# Altium PCB My_CryStal.PcbDoc
Units mm, origin at the board's own origin, x right, y up, seen from the top; angles counter-clockwise.
Board outline 118.11 x 115.19 mm, 2 copper layers (Top Layer, Bottom Layer); 87 components, 64 nets, 286 pads, 67 vias.
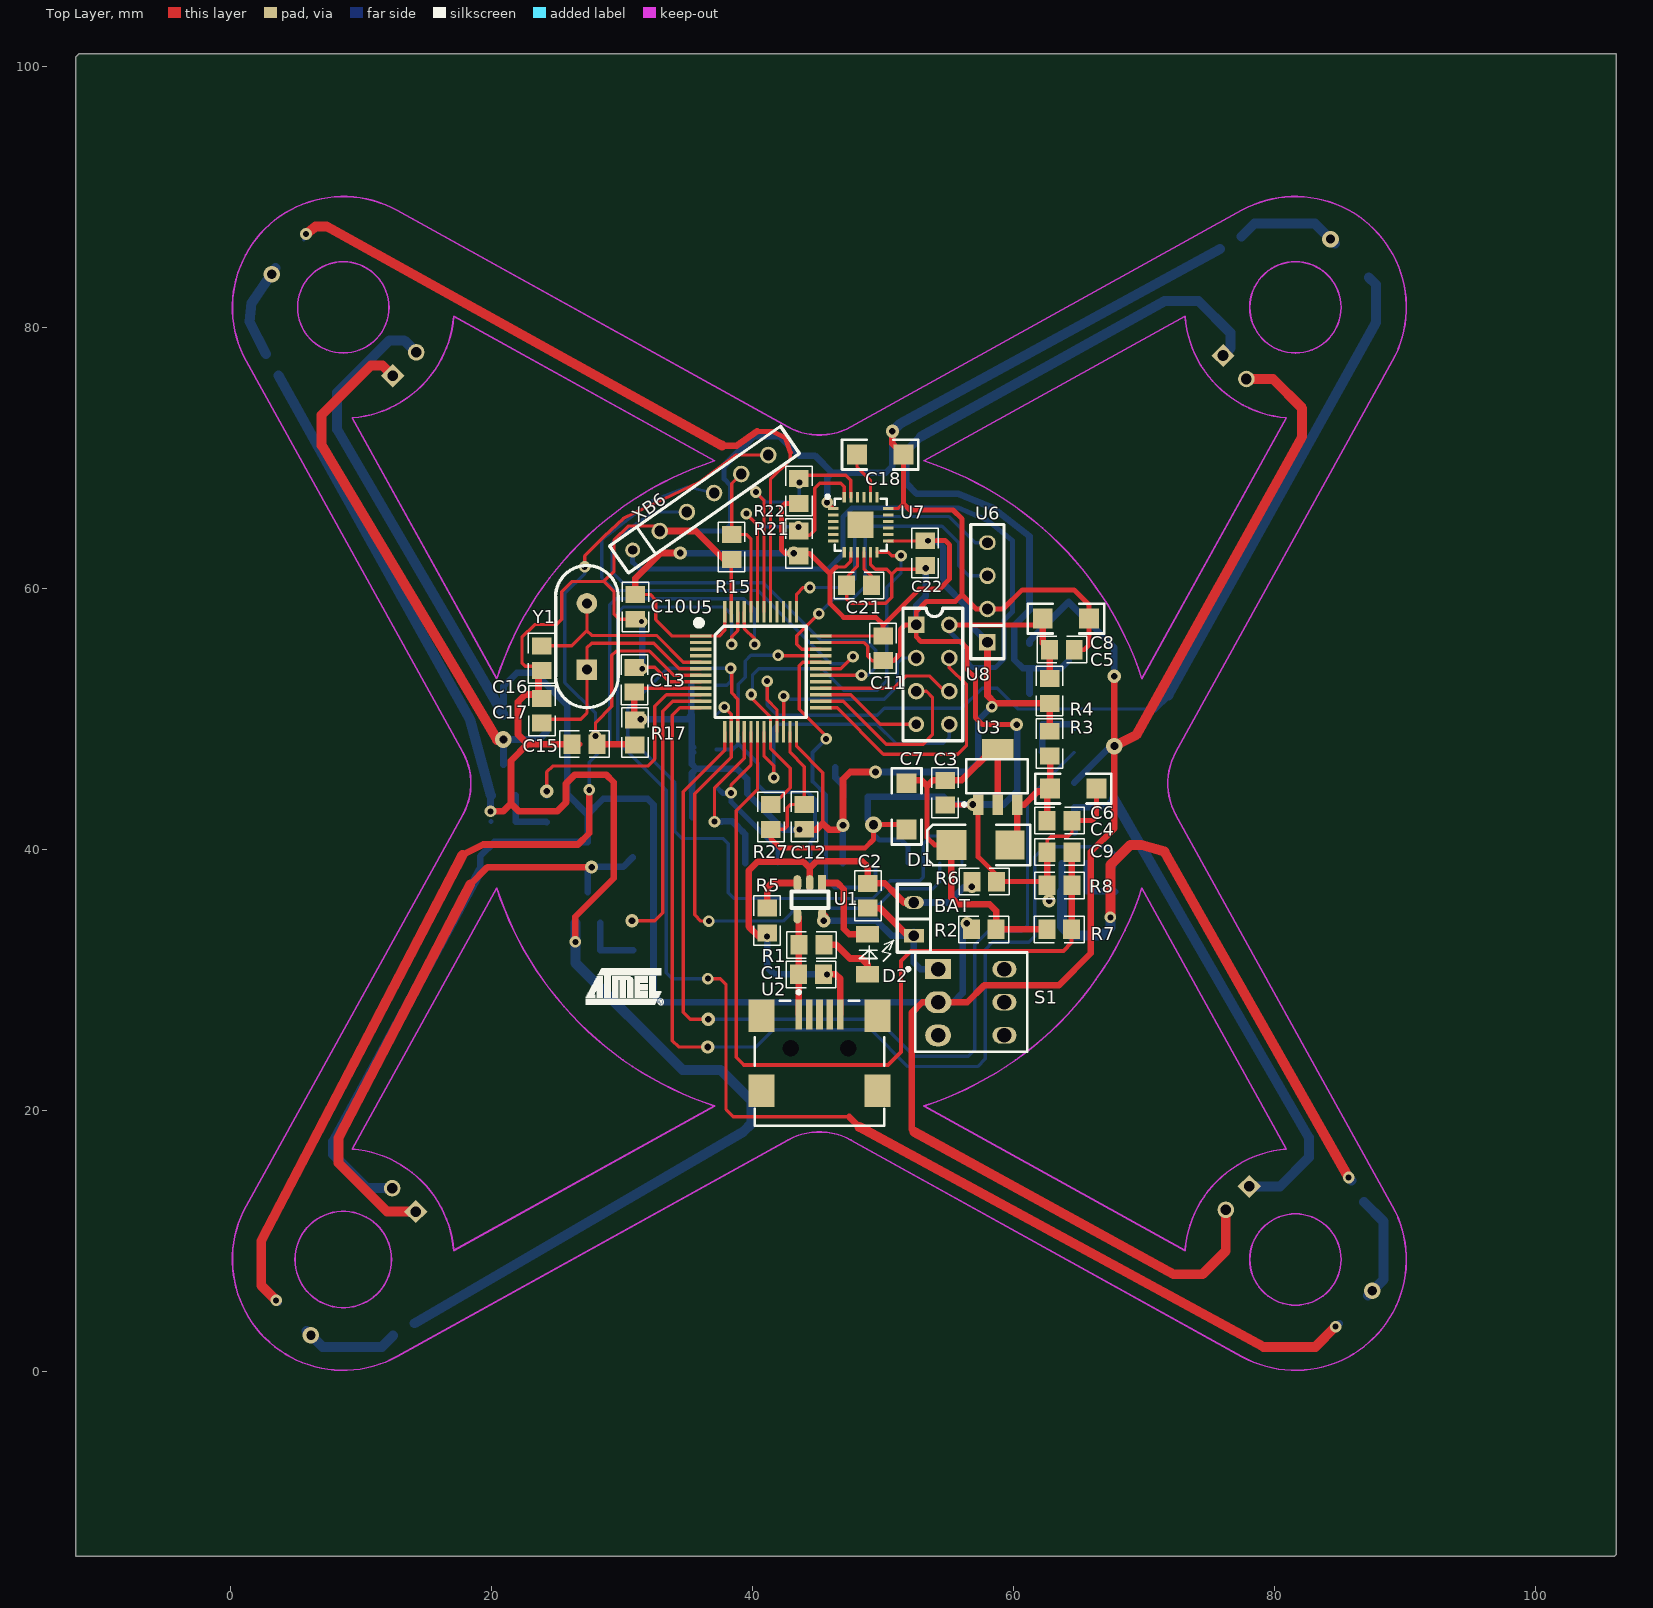
[diagram p0: Top Layer view]
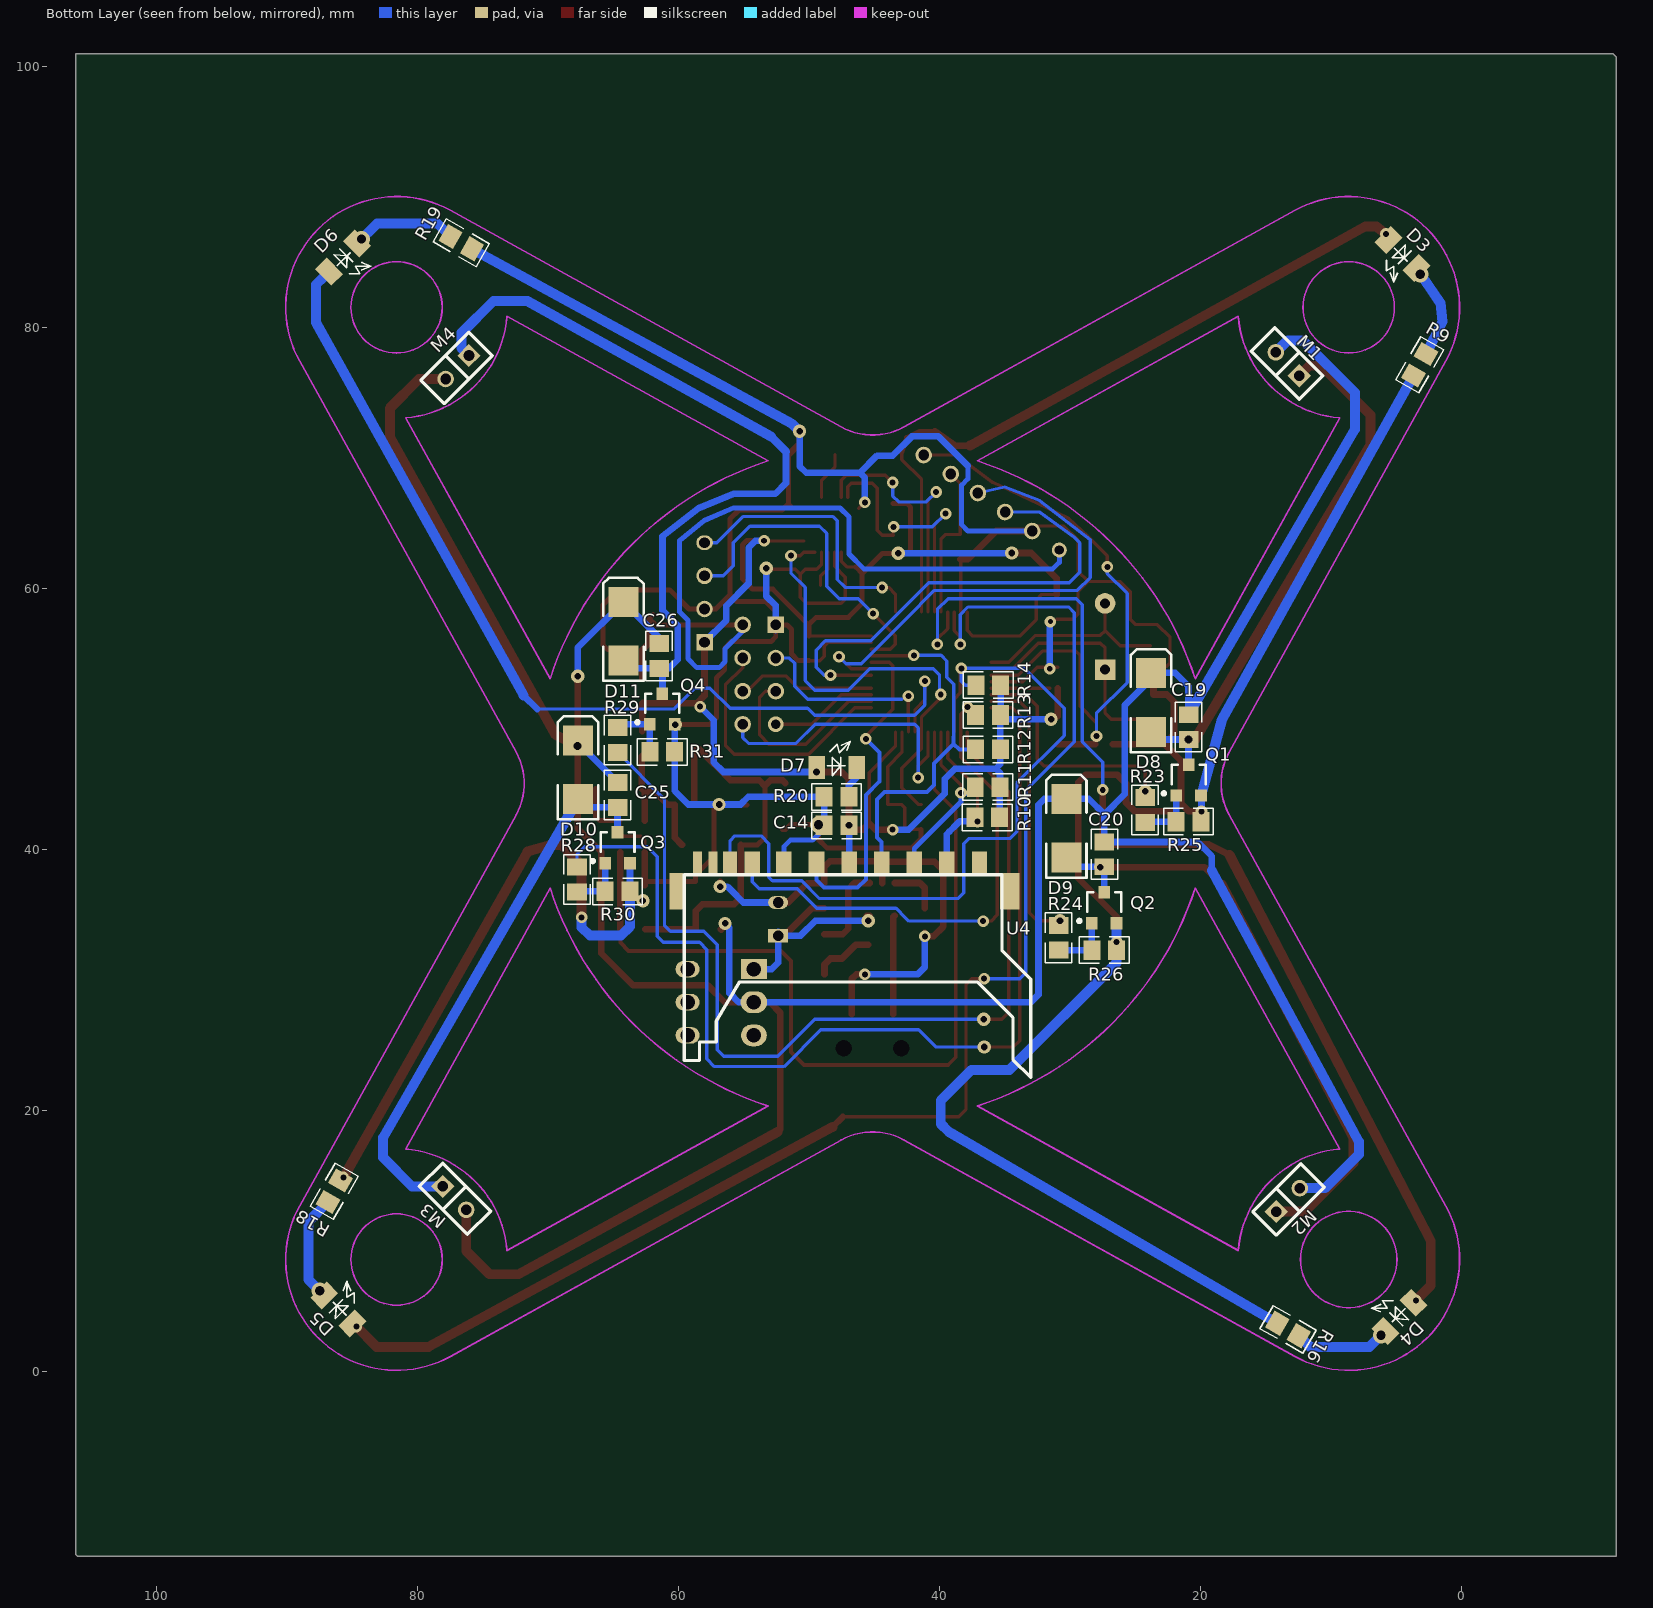
[diagram p1: Bottom Layer view, seen from below]

## Layer stack, top to bottom
Top Layer: signal copper 0.0356
Dielectric: dielectric 0.32, FR-4, Dk 4.8
Bottom Layer: signal copper 0.0356

## Board outline
-11.633,101.016 106.223,101.016 106.223,-14.046 106.096,-14.173 -11.887,-14.173 -11.887,100.762 -11.633,101.016

## Design rules (kind name [scope] priority, off if disabled: settings)
Clearance [All] p1: gap=0.24
PolygonConnect [All] p1: connectstyle=Relief reliefconductorwidth=0.254 reliefentries=4 polygonreliefangle="90 Angle"
RoutingVias [All] p1: holewidth=0.508 width=1.016 viastyle="Through Hole" minholewidth=0.381 minwidth=0.762 maxholewidth=0.711 maxwidth=1.27
SilkscreenOverComponentPads [All] p1: minsilkscreentomaskgap=0.254
SolderMaskExpansion [All] p1: expansion=0.102
Width [All] p1: maxlimit=2.54 minlimit=0.203 preferedwidth=0.254 minimp=50.000000 maximp=50.000000 favimp=50.000000
27 further rules are at their usual default settings.

## Components (designator, comment, footprint, x,y, rotation, side; value= is the part's Value field where it differs from the comment)
BAT "CON1" SIP2#1 52.375,33.401 r90 top (schematic designator CON1)
C1 "1uF" "0805 - duplicate" 45.441,30.429 r180 top
C2 "1uF" "0805 - duplicate" 48.844,37.414 r270 top
C3 "104" "0805 - duplicate" 54.762,43.409 r90 top
C4 "104" "0805 - duplicate" 64.491,42.215 r180 top
C5 "104" "0805 - duplicate" 64.668,55.321 r180 top
C6 "10uF/25V" 1206 62.814,44.679 r0 top
C7 "47uF/25V" 1206 51.816,45.085 r270 top
C8 "10uF/25V" 1206 62.255,57.709 r0 top
C9 "1uF" "0805 - duplicate" 62.586,39.802 r0 top
C10 "104" "0805 - duplicate" 31.013,57.658 r90 top
C11 "104" "0805 - duplicate" 50.013,54.483 r90 top
C12 "104" "0805 - duplicate" 43.967,43.459 r270 top
C13 "104" "0805 - duplicate" 30.937,53.975 r270 top
C14 "1uF" "0805 - duplicate" 46.939,41.859 r0 bottom
C15 "104" "0805 - duplicate" 26.162,48.082 r0 top
C16 "Cap" "0805 - duplicate" 23.825,53.721 r90 top
C17 "Cap" "0805 - duplicate" 23.851,51.587 r270 top
C18 "2.2uF/25V" 1206 48.006,70.282 r0 top
C19 "104" "0805 - duplicate" 20.904,48.438 r90 bottom
C20 "104" "0805 - duplicate" 27.356,38.684 r90 bottom
C21 "103" "0805 - duplicate" 49.124,60.249 r180 top
C22 "104" "0805 - duplicate" 53.238,63.678 r270 top
C25 "104" "0805 - duplicate" 64.668,43.231 r90 bottom
C26 "104" "0805 - duplicate" 61.493,53.899 r90 bottom
D1 "Diode" DIODE-SMB#1 59.741,40.361 r180 top
D2 "LED" LED 48.819,30.455 r90 top
D3 "LED" LED 5.584,86.737 r225 bottom
D4 "LED" LED 3.661,5.254 r315 bottom
D5 "LED" LED 85.018,3.661 r45 bottom
D6 "LED" LED 86.813,84.306 r135 bottom
D7 "LED" LED 49.403,46.304 r180 bottom
D8 "BAT54C" DIODE-SMB#2 23.774,49.022 r90 bottom
D9 "BAT54C" DIODE-SMB#2 30.277,39.395 r90 bottom
D10 "BAT54C" DIODE-SMB#2 67.716,43.866 r90 bottom
D11 "BAT54C" DIODE-SMB#2 64.237,54.483 r90 bottom
M1 "CON2" SIP2#2 12.421,76.327 r45 bottom (schematic designator CON2)
M2 "CON3" SIP2#2 14.173,12.243 r135 bottom (schematic designator CON3)
M3 "CON4" SIP2#2 78.08,14.173 r225 bottom (schematic designator CON4)
M4 "CON5" SIP2#2 76.073,77.876 r315 bottom (schematic designator CON5)
Q1 "SI2302" SOT-23 21.844,44.145 r180 bottom
Q2 "SI2302" SOT-23 28.321,34.366 r180 bottom
Q3 "SI2302" SOT-23 65.634,38.964 r180 bottom
Q4 "SI2302" SOT-23 62.205,49.606 r180 bottom
R1 "1k" "0805 - duplicate" 45.466,32.69 r180 top
R2 "0Ω" "0805 - duplicate" 58.674,33.884 r180 top
R3 "0Ω" "0805 - duplicate" 62.789,49.073 r270 top
R4 "0Ω" "0805 - duplicate" 62.789,53.111 r270 top
R5 "1k" "0805 - duplicate" 41.123,33.604 r90 top
R6 "0Ω" "0805 - duplicate" 56.82,37.541 r0 top
R7 "10k" "0805 - duplicate" 64.465,33.884 r180 top
R8 "10k" "0805 - duplicate" 62.586,37.262 r0 top
R9 "470" "0805 - duplicate" 3.658,76.352 r120 bottom
R10 "10K" "0805 - duplicate" 35.382,42.469 r0 bottom
R11 "10K" "0805 - duplicate" 35.357,44.78 r0 bottom
R12 "10K" "0805 - duplicate" 35.331,47.676 r0 bottom
R13 "10K" "0805 - duplicate" 35.331,50.317 r0 bottom
R14 "10K" "0805 - duplicate" 35.306,52.603 r0 bottom
R15 "100k" "0805 - duplicate" 38.405,62.255 r90 top
R16 "470" "0805 - duplicate" 14.097,3.683 r210 bottom
R17 "10k" "0805 - duplicate" 30.988,48.031 r90 top
R18 "470" "0805 - duplicate" 85.928,14.63 r300 bottom
R19 "470" "0805 - duplicate" 75.844,86.055 r30 bottom
R20 "470" "0805 - duplicate" 48.844,44.044 r180 bottom
R21 "10K" "0805 - duplicate" 43.561,62.509 r90 top
R22 "10K" "0805 - duplicate" 43.561,66.548 r90 top
R23 "100" "0805 - duplicate" 24.232,43.993 r270 bottom
R24 "100" "0805 - duplicate" 30.861,34.188 r270 bottom
R25 "10k" "0805 - duplicate" 19.964,42.139 r0 bottom
R26 "10k" "0805 - duplicate" 26.416,32.283 r0 bottom
R27 "100k" "0805 - duplicate" 41.402,41.554 r90 top
R28 "100" "0805 - duplicate" 67.793,38.659 r270 bottom
R29 "100" "0805 - duplicate" 64.668,47.447 r90 bottom
R30 "10k" "0805 - duplicate" 63.729,36.805 r0 bottom
R31 "10k" "0805 - duplicate" 60.3,47.498 r0 bottom
S1 "SW" SWITCH_B1 54.229,30.836 r0 top
U1 "MCP73831-充电" SOT23-5 45.339,37.44 r270 top
U2 "Power" USB5 45.136,24.435 r270 top
U3 "HT7533" SOT-89 57.302,43.434 r0 top
U4 "TF" SDCARD_L 58.598,38.964 r180 bottom locked
U5 "STM32F103C8T6-1" LQFP48S 36.017,56.363 r0 top
U6 "JLINK" SIP4 58.014,55.905 r90 top
U7 "MPU6050" QFN24 46.203,66.192 r0 top
U8 "NRF24L01" DIP8 52.553,57.226 r0 top
XB6 "" SIP6 30.81,62.967 r35 top (schematic designator *1)
Y1 "8M" XTAL 27.305,53.797 r90 top
? "Comment" LOGO-Atmel 28.931,30.455 r0 top

## Footprints (in the part's own frame and the unit in brackets; to place one, negate y for a bottom-side part, rotate by r counter-clockwise, add the part's x,y. Pads: shape width x height; smd on the part's side, far side on the other; paste and mask are expansions set on the pad)
"0805 - duplicate" [mm]
  rect 1.3x1.5 smd: 1(0,0) 2(1.9,0)
  silkscreen extent -0.96,-1.02 2.85,1.02, body extent -0.19,-0.51 2.09,0.51, height 1
1206 [mil]
  rect 60x60 smd: 1(0,0) 2(140,0)
  silkscreen extent -45,-45 185,45, body extent -5,-35 145,35, height 39
DIODE-SMB#1 [mm]
  rect 2.235x2.235 smd: 1(0,0)
  rect 2.3x2.3 smd: 2(4.5,0)
  silkscreen extent -1.55,-1.55 6.35,1.55
DIODE-SMB#2 [mm]
  rect 2.3x2.3 smd: 1(0,0) 2(4.5,0)
  silkscreen extent -1.55,-1.55 6.35,1.55
DIP8 [mil]
  rect 50x50 hole 32: 1(0,0)
  round 50 hole 32: 2(100,0) 3(0,-100) 4(100,-100) 5(0,-200) 6(100,-200) 8(100,-300)
  round 48 hole 30: 7(0,-300)
  silkscreen extent -40,-350 140,50
LED [mil]
  rect 50x70 smd: 1(0,0) 2(120,0)
  silkscreen extent 31,-78 101,25
LOGO-Atmel [mm]
  silkscreen extent -1.7,-2.34 4.27,0.46
LQFP48S [mil]
  rect 65x10 smd: 1(0.42,0.29) 2(0.42,-19.39) 3(0.42,-39.08) 4(0.42,-58.76) 5(0.42,-78.45) 6(0.42,-98.13) 7(0.42,-117.82) 8(0.42,-137.5) 9(0.42,-157.19) 10(0.42,-176.87) 11(0.42,-196.56) 12(0.42,-216.24) 25(362.63,-216.24) 26(362.63,-196.56) 27(362.63,-176.87) 28(362.63,-157.19) 29(362.63,-137.5) 30(362.63,-117.82) 31(362.63,-98.13) 32(362.63,-78.45) 33(362.63,-58.76) 34(362.63,-39.08) 35(362.63,-19.39) 36(362.63,0.29)
  rect 10x65 smd: 13(73.26,-289.08) 14(92.94,-289.08) 15(112.63,-289.08) 16(132.31,-289.08) 17(152,-289.08) 18(171.68,-289.08) 19(191.37,-289.08) 20(211.05,-289.08) 21(230.74,-289.08) 22(250.42,-289.08) 23(270.11,-289.08) 24(289.79,-289.08) 37(289.79,73.13) 38(270.11,73.13) 39(250.42,73.13) 40(230.74,73.13) 41(211.05,73.13) 42(191.37,73.13) 43(171.68,73.13) 44(152,73.13) 45(132.31,73.13) 46(112.63,73.13) 47(92.94,73.13) 48(73.26,73.13)
  silkscreen extent -10,-246 319,46
QFN24 [mm]
  rect 2x2 smd: 0(2.09,-1.29)
  rect 0.8x0.25 smd: 1(-0.011,-0.04) 2(-0.011,-0.54) 3(-0.011,-1.04) 4(-0.011,-1.54) 5(-0.011,-2.04) 6(-0.011,-2.54) 13(4.191,-2.54) 14(4.191,-2.04) 15(4.191,-1.54) 16(4.191,-1.04) 17(4.191,-0.54) 18(4.191,-0.04)
  rect 0.25x0.8 smd: 7(0.84,-3.391) 8(1.34,-3.391) 9(1.84,-3.391) 10(2.34,-3.391) 11(2.84,-3.391) 12(3.34,-3.391) 19(3.34,0.811) 20(2.84,0.811) 21(2.34,0.811) 22(1.84,0.811) 23(1.34,0.811) 24(0.84,0.811)
  silkscreen extent -0.57,-3.29 4.09,0.99
SDCARD_L [mm]
  rect 1.2x1.8 smd: 1(19.152,0) 2(16.662,0) 3(14.169,-0.009) 4(11.669,-0.009) 5(9.169,-0.009) 6(6.669,-0.009) 7(4.244,-0.009)
  rect 1.1x1.8 smd: 8(2.54,0)
  rect 1.168x1.8 smd: 9(21.669,-0.009)
  rect 0.7x1.8 smd: 10(1.244,-0.009) 12(0.051,0)
  rect 1.016x2.8 smd: 11(-1.575,-2.143)
  rect 1.5x2.8 smd: 11(23.978,-2.143)
  silkscreen extent -0.98,-16.42 25.59,-0.9
SIP2#1 [mil]
  rect 40x60 hole 32: 1(0,0)
  oval 38x60 hole 32: 2(100,0)
  silkscreen extent -50,-50 155,50
SIP2#2 [mil]
  rect 50x50 hole 32: 1(0,0)
  round 50 hole 32: 2(100,0)
  silkscreen extent -50,-50 155,50
SIP4 [mil]
  rect 50x50 hole 32: 1(0,0)
  round 50 hole 32: 2(100,0) 3(200,0)
  oval 45x50 hole 32: 4(300,0)
  silkscreen extent -50,-50 355,50
SIP6 [mil]
  round 45 hole 28: 1(0,0)
  round 50 hole 32: 2(100,0) 3(200,0) 4(300,0) 5(400,0) 6(500,0)
  silkscreen extent -50,-50 580,50
SOT23-5 [mm]
  rect 1.2x0.6 smd: 1(0,0)
  oval 1.2x0.6 smd: 2(0,-0.95) 3(0,-1.9) 4(2.5,-1.9) 5(2.5,0)
  silkscreen extent 0.66,-2.38 1.91,0.48
SOT-23 [mm]
  rect 0.9x0.95 smd: 1(0,0) 2(1.9,0) 3(0.95,2.35)
  silkscreen extent -1.08,0.03 2.25,2.35
SOT-89 [mm]
  rect 0.8x1.55 smd: 1(0,0) 2(3,0) 3(1.5,0)
  rect 2.45x1.55 smd: 3(1.5,4.25)
  silkscreen extent -1.2,-0.1 3.81,3.49, body extent -0.89,-0.89 3.81,5.08, height 0.8
SWITCH_B1 [mm] "单刀"
  rect 1.981x1.524 hole 1.1: 1(0,0)
  oval 2.032x1.676 hole 1.1: 2(0,-2.54)
  oval 1.981x1.676 hole 1.1: 3(0,-5.08)
  oval 1.85x1.27 hole 1.1: 4(5.08,-5.08) 5(5.08,-2.54) 6(5.08,0)
  silkscreen extent -2.42,-6.35 6.82,1.27
USB5 [mm]
  rect 2.3x0.5 smd: 1(-2.927,-1.6) 2(-2.927,-0.8) 3(-2.927,0) 4(-2.927,0.8) 5(-2.927,1.6)
  rect 2.5x2 smd: 6(-2.827,4.45) 7(2.927,4.45) 8(-2.827,-4.45) 9(2.927,-4.45)
  round 0.6 hole 1.27 unplated: MH1(-0.327,2.2) MH2(-0.327,-2.2)
  silkscreen extent -4.75,-4.95 5.62,4.95
XTAL [mil]
  rect 62x62 hole 30: 1(0,0)
  round 62 hole 30: 2(200,0)
  silkscreen extent -115,-94 314,95

## Part data
BAT M2 M3 M4: library part CON2
C1 C2 C9 C14 C21 C22: library part "CAP SMD 0603  X5R 1礔 25V 10%", "0805"
C3 C4 C5: library part C1, "0805"
C6 C7 C8 C18: library part "Cap Pol", "0805"
C10 C11 C12 C13 C15 C19 C20 C25 C26: library part C1, "Cap"
C16 C17: "Capacitor"
D1: "整流二极管"
D2 D3 D4 D5 D6 D7: "发光二极管"
D8 D9 D10 D11: library part TVS
Q1 Q2 Q3 Q4: library part IRF740, "N-Channel MOSFET"
R1 R2 R3 R4 R5 R6 R7 R8 R9 R10 R11 R12 R13 R14 R15 R16 R17 R18 R19 R20 R21 R22 R23 R24 R25 R26 R27 R28 R29 R30 R31: library part RES_1
U1: library part MCP73831
U6: library part X4
U8: library part "Header 4X2", "Header, 6-Pin"
XB6: library part XB6
Y1: library part XTAL, "Crystal Oscillator"

## Via types
v1: diameter 0.889, hole 0.457, Top Layer to Bottom Layer, 39 vias
v2: diameter 1.016, hole 0.508, Top Layer to Bottom Layer, 19 vias
v3: diameter 1.27, hole 0.711, Top Layer to Bottom Layer, 5 vias
v4: diameter 1.27, hole 0.61, Top Layer to Bottom Layer, 2 vias
v5: diameter 0.889, hole 0.406, Top Layer to Bottom Layer, 2 vias

## Nets (pads, with @x,y where several pads share a name; then routed paths per layer and width w, separated by ;. In a path a pad name is that pad's centre, name@x,y a point inside that pad or via, vN(x,y) a via of type N, cw(c..) or ccw(c..) an arc to the next point about the centre after c; other vN are vias at no path point)
3V3: C10.2 C11.2 C12.2 C13.2 C14.1 C22.1 D7.1 R3.1 R4.2 R10.1 R11.1 R12.1 R13.1 R14.1 R17.2 R21.1 R22.1 U4.4 U5.1 U5.9 U5.24 U5.36 U5.48 U6.1 U7.8 U7.13 | length 150.7
  Top Layer w0.254: C10.2 32.156,59.558 32.588,59.126 32.588,57.633 33.851,56.37 U5.1 37.447,56.37 37.878,56.801 U5.48 ; C13.2@31.526,52.37 U5.9 ; U5.24 43.378,47.904 45.39,45.893 45.39,42.012 ; U5.36 C11.2@50,56.37 ; 46.431,61.671 47.092,61.671 47.542,62.122 U7.8 ; U7.13 C22.1@53.213,63.652
  Top Layer w0.381: R22.1 42.52,66.548 42.215,66.243 42.215,62.992 42.494,62.713 v2(43.155,62.713) 44.374,62.713 45.923,61.163 ; 46.431,61.671 45.923,61.163 ; C11.2 50.013,57.201 52.781,59.969 54.331,59.969 55.118,60.757 55.118,63.348 54.762,63.703 54.127,63.703 54.102,63.678 v1(53.442,63.678) ; 50.013,57.252 49.454,57.81 46.99,57.81 45.923,58.877 45.923,61.163
  Top Layer w0.508: R17.2@30.937,50.236 C13.2 30.937,52.38 C13.2@30.947,52.38 ; C10.2 C10.2@31.013,59.817 ; v2(34.468,62.738) 32.969,62.738 31.013,60.782 C10.2@31.013,59.868 ; C12.2 43.967,41.534 44.912,41.534 45.39,42.012 45.867,41.534 46.614,41.534 v2(46.939,41.859) 46.939,45.39 47.498,45.949 v2(49.428,45.949) ; U6.1 58.014,51.801 58.603,51.211 R4.2 ; R4.2@62.743,51.257 R4.2 ; R3.1 R4.2 ; C10.2@31.013,59.817 C10.2@31.013,59.868 ; C10.2@31.013,59.817 30.988,59.842 C10.2@31.013,59.868
  Bottom Layer w0.381: R12.1@35.336,47.625 R12.1@35.509,47.452 ; R11.1@35.357,44.526 R11.1 ; R12.1@35.357,47.981 R12.1@35.509,47.828
  Bottom Layer w0.508: v2(31.445,49.987) 35.001,49.987 R13.1 ; v2@34.493,62.713 v2(43.155,62.713) ; R14.1 35.306,50.343 R13.1 ; R12.1@35.331,47.346 R12.1 R13.1 ; R12.1@35.336,47.625 35.336,46.553 35.687,46.203 ; R11.1@35.357,44.526 35.382,44.501 R10.1 35.382,43.383 ; R11.1 35.357,45.872 35.687,46.203 ; v1(43.586,41.534) 42.362,41.534 39.599,44.298 39.599,45.415 38.811,46.203 35.687,46.203 ; U4.4 C14.1@46.929,41.29 ; v2(49.428,45.949) 56.566,45.949 57.302,46.685 57.302,49.911 v1(58.344,50.952) ; v1(53.442,63.678) 54.102,63.678 54.635,63.144 54.635,60.401 56.337,58.699 56.337,57.582 U6.1
BATTERY: C9.2 R7.1 R8.2 U5.18 | length 66.4
  Top Layer w0.254: 39.345,23.495 38.76,24.079 38.76,42.977 40.378,44.594 U5.18
  Top Layer w0.305: 39.345,23.495 50.394,23.495 51.384,24.486 51.384,31.471 52.146,32.233 63.83,32.233 64.465,32.868 R7.1
  Top Layer w0.508: R7.1 R8.2@64.465,37.241 ; R8.2 C9.2
BGND: 
BOOT0: R15.2 U5.44 XB6.5 | length 12.2
  Top Layer w0.254: XB6.5 38.405,68.066 R15.2 39.553,64.155 39.878,63.83 U5.44
GND: C3.1 C4.1 C5.1 C6.2 C7.2 C8.2 C9.1 C10.1 C11.1 C12.1 C13.1 C14.2 C15.1 C16.1 C17.1 C18.2 C21.2 C22.2 Q1.2 Q2.2 Q3.2 Q4.2 R6.2 R8.1 R9.1 R15.1 R16.1 R18.1 R19.1 R20.1 R25.1 R26.1 R27.1 R30.1 R31.1 U3.1 U4.6 U5.8 U5.23 U5.35 U5.47 U6.2 U7.1 U7.9 U7.11 U7.18 U8.1 XB6.2 | length 438
  Top Layer w0.254: C16.1@23.571,54.051 22.581,54.051 22.327,54.305 22.327,56.286 23.292,57.252 24.968,57.252 25.375,57.658 25.375,59.766 26.162,60.554 28.6,60.554 ; C13.1 32.512,53.975 33.617,52.87 U5.8 ; C10.1 29.769,57.658 29.388,58.039 29.388,59.766 28.6,60.554 ; XB6.2@32.459,64.804 30.455,64.804 29.388,63.738 29.388,61.341 28.6,60.554 ; U5.47 38.378,62.229 R15.1 ; R27.1 42.443,41.554 42.672,41.783 42.672,43.205 42.926,43.459 C12.1 43.967,46.355 42.878,47.444 U5.23 ; U5.35 48.549,55.87 48.844,55.575 48.844,54.813 49.174,54.483 C11.1 ; v1(45.719,66.624) U7.1 ; U7.9 48.042,61.708 47.224,60.889 C21.2 47.224,59.202 47.549,58.877 50.216,58.877 50.673,59.334 50.673,61.112 ; U7.11 49.042,61.879 49.428,61.493 50.292,61.493 50.673,61.112 ; U7.18 51.166,66.152 51.562,66.548 ; C22.2@53.238,61.493 51.054,61.493 50.673,61.112 ; C9.1 62.586,40.716 62.89,41.021 64.211,41.021 64.491,41.3 C4.1
  Top Layer w0.381: C16.1@23.571,54.051 C16.1@23.597,54.026 ; R27.1 41.402,40.843 42.113,40.132 48.641,40.132 49.276,40.767 v3(49.276,41.91) 51.435,41.91 C7.2 C7.2@52.019,41.529 ; C11.1 50.825,54.483 51.333,54.991 51.333,56.871 51.689,57.226 U8.1 ; C18.2 51.562,66.548 52.07,66.04 55.372,66.04 56.058,65.354 56.058,59.538 ; C3.1@54.762,43.434 v2@56.515,43.434 ; U3.1 57.302,39.446 58.72,38.029 R6.2 R8.1@62.306,37.541 ; v2(60.249,49.581) 57.633,49.581 57.099,50.114 57.099,53.162 56.464,53.797 56.464,55.448 55.956,55.956 52.908,55.956 52.553,56.312 U8.1 ; C4.1 66.04,42.215 66.37,42.545 C6.2 ; C5.1 65.43,55.321 65.811,55.702 C8.2 65.811,58.75 64.643,59.919 60.681,59.919 59.207,58.445 U6.2 57.15,58.445 56.058,59.538 ; U8.1 52.553,58.242 53.34,59.03 55.55,59.03 56.058,59.538
  Top Layer w0.508: v1(19.914,42.926) 20.879,42.926 21.488,43.536 ; C16.1@23.597,54.026 23.597,51.892 22.581,51.892 22.022,51.333 22.022,48.819 22.758,48.082 ; v1(26.416,32.918) 26.416,34.849 29.362,37.795 29.362,45.161 28.778,45.745 26.391,45.745 25.705,45.06 25.705,43.612 25.019,42.926 22.098,42.926 21.488,43.536 ; C15.1@26.695,48.082 C15.1 22.758,48.082 ; XB6.2 35.653,64.423 37.821,62.255 R15.1 ; v2(50.724,72.067) 50.724,71.12 C18.2 ; R8.1 C9.1 ; 21.488,43.536 21.488,46.812 22.758,48.082
  Top Layer w0.762: v1(67.437,34.798) 67.437,38.837 68.961,40.361 69.799,40.361 71.577,39.853 v1(85.7,14.859)
  Bottom Layer w0.254: R30.1@63.475,36.551 R30.1
  Bottom Layer w0.381: R25.1@19.944,42.159 R25.1 ; XB6.2 37.821,64.423 38.303,64.906 38.303,67.945 37.821,68.428 37.821,69.418 ; C14.2@49.276,41.173 49.733,40.716 51.435,40.716 51.929,40.222 U4.6 ; C14.2@49.276,41.859 v3(49.276,41.91) ; U8.1@52.553,56.769 U8.1
  Bottom Layer w0.508: v1(19.914,42.926) 19.914,44.115 Q1.2 ; v5(31.496,57.48) 31.547,57.429 v5(31.547,53.873) ; 37.821,69.418 40.081,71.679 42.113,71.679 43.586,70.206 44.78,70.206 46.101,68.885 ; v1(45.719,66.624) 45.719,68.503 46.101,68.885 ; v3(49.276,41.91) 49.083,42.103 48.844,42.342 R20.1@48.844,44.039 ; v2(50.724,72.067) 50.724,69.393 50.216,68.885 46.101,68.885 ; U8.1 52.553,58.709 53.289,59.446 v2(53.289,61.57) ; Q4.2 60.305,47.503 R31.1 60.3,44.501 59.258,43.459 v2(56.896,43.459) 55.245,43.459 54.661,44.044 R20.1 ; R30.1 63.729,38.959 Q3.2 ; R20.1@48.844,44.039 48.839,44.039 R20.1 ; R20.1@48.844,44.039 R20.1
  Bottom Layer w0.762: R9.1 18.339,49.962 Q1.2 ; R16.1 39.319,18.39 39.903,18.974 39.903,20.752 37.567,23.089 34.646,23.089 26.416,31.318 R26.1 v1(26.416,32.918) 26.416,34.361 Q2.2 ; v2(50.724,72.067) 51.333,72.676 R19.1 ; R30.1 63.729,34.087 64.414,33.401 66.802,33.401 67.437,34.036 v1(67.437,34.798) ; v1(85.7,14.859) R18.1
  other v2: 62.738,36.068
LED1: D3.1 U5.41 | length 56.3
  Top Layer w0.254: U5.41 41.378,67.666 41.378,68.378 42.901,69.901 42.901,70.46
  Top Layer w0.381: 40.361,72.06 41.504,72.06 42.52,71.577 42.901,70.46
  Top Layer w0.508: 37.668,70.968 38.786,70.968 40.361,72.06
  Top Layer w0.762: v1(5.766,87.198) 6.502,87.782 7.341,87.782 37.668,70.968
  Bottom Layer w0.254: D3.1 v1(5.766,87.198)
LED2: D4.1 U5.45 | length 83.8
  Top Layer w0.254: U5.45 39.378,56.947 v1@40.157,56.167
  Top Layer w0.508: 17.755,39.573 19.355,40.386 26.619,40.386 27.483,41.25 v1(27.483,44.577)
  Top Layer w0.762: v1(3.48,5.436) 2.337,6.579 2.337,10.008 17.755,39.573
  Bottom Layer w0.254: v1(27.483,44.577) 27.483,46.711 29.058,48.285 29.058,58.776 29.515,59.233 39.345,59.233 40.157,58.42 40.157,56.718 40.157,56.591 v1(40.157,55.728)
  Bottom Layer w0.508: v1(3.48,5.436) D4.1
LED3: D5.1 U5.46 | length 110.5
  Top Layer w0.254: v1(36.576,30.099) 37.516,30.099 37.973,29.642 37.973,20.066 38.532,19.507 47.422,19.507 ; v1(38.405,55.728) 38.405,56.321 38.878,56.794 U5.46
  Top Layer w0.508: 47.422,19.507 48.184,18.745
  Top Layer w0.762: 48.184,18.745 79.172,1.88 83.16,1.88 v1(84.709,3.429)
  Bottom Layer w0.254: v1(36.576,30.099) 33.833,30.099 33.376,30.556 33.376,44.552 29.667,48.26 29.667,58.166 30.099,58.598 37.821,58.598 38.405,58.014 v1(38.405,55.728)
  Bottom Layer w0.508: v1(84.709,3.429) 84.941,3.661 D5.1
LED4: D6.1 U5.21 | length 75.5
  Top Layer w0.254: v1(41.123,52.908) 41.123,51.486 41.878,50.73 U5.21
  Bottom Layer w0.254: v1(41.123,52.908) 41.123,51.079 41.91,50.292 49.581,50.292 50.114,50.825 56.058,50.825 57.607,52.375 58.776,52.375 60.376,50.775 70.841,50.775
  Bottom Layer w0.508: 70.841,50.775 71.882,51.816
  Bottom Layer w0.762: 71.882,51.816 87.808,80.416 87.808,83.312 D6.1@87.248,83.872
M1: R23.1 U5.10 | length 18.6
  Top Layer w0.254: v2(24.232,44.475) 24.232,45.949 24.689,46.406 31.852,46.406 31.979,46.406 32.512,46.939 32.512,50.978 33.404,51.87 U5.10
  Bottom Layer w0.254: R23.1 v2(24.232,44.475)
M2: R24.1 U5.11 | length 21.3
  Top Layer w0.254: v2(30.759,34.544) 32.512,34.544 33.122,35.154 33.122,50.622 33.869,51.37 U5.11
M3: R28.1 U5.12 | length 79.9
  Top Layer w0.254: U5.12 34.436,50.87 33.858,50.292 33.858,25.349 34.341,24.867 v2(36.576,24.867)
  Bottom Layer w0.254: v2(36.576,24.867) 40.284,24.867 41.605,26.187 49.098,26.187 51.918,23.368 57.252,23.368 57.836,23.952 57.836,32.334 58.395,32.893 61.189,32.893 61.646,33.35 61.646,39.446 62.408,40.208 67.208,40.208 67.793,39.624 R28.1
M4: R29.1 U5.13 | length 74.2
  Top Layer w0.254: v2(36.601,27) 35.23,27 34.696,27.534 34.696,44.425 37.878,47.606 U5.13
  Bottom Layer w0.254: v2(36.601,27) 49.555,27 50.317,26.238 52.4,24.155 56.54,24.155 57.048,24.663 57.048,32.715 58.064,33.731 60.63,33.731 61.087,34.188 61.087,43.866 R29.1
MOTOR: C19.2 C20.2 C25.2 C26.2 D8.2 D9.2 D10.2 D11.2 M1.2 M2.2 M3.2 M4.2 R2.2 S1.2 | length 274.9
  Top Layer w0.508: 52.416,18.351 52.197,18.57 52.197,27.483 53.01,28.296 S1.2 56.464,28.296 57.76,29.591 63.475,29.591 65.938,32.055 65.938,39.827 67.742,41.631 v4(67.742,47.93) v2(67.742,53.289) ; R2.2@56.744,33.853 R2.2
  Top Layer w0.762: 52.416,18.351 72.263,7.442 74.498,7.442 76.284,9.228 M3.2 ; v4(67.742,47.93) 69.418,48.768 82.144,71.658 82.144,73.838 79.901,76.08 M4.2
  Bottom Layer w0.508: 19.126,38.379 19.126,39.497 20.213,40.584 C20.2 27.356,42.697 ; C19.2 20.904,52.527 21.924,53.547 D8.2@23.749,53.547 ; D8.2@23.774,53.547 D8.2@23.749,53.547 ; v2(56.439,34.341) 56.109,34.011 56.109,29.007 55.397,28.296 S1.2 32.995,28.296 32.41,28.88 32.41,43.434 31.949,43.895 D9.2 28.554,43.895 27.356,42.697 ; C26.2@61.239,55.799 61.239,55.986 D11.2 67.742,55.478 v2(67.742,53.289) ; C25.2 67.467,47.93 v4(67.742,47.93) ; D8.2@23.749,53.547 23.749,53.111 25.806,51.054 25.806,44.247 27.356,42.697
  Bottom Layer w0.762: M2.2 10.447,14.039 7.849,16.637 7.849,17.602 19.126,38.379 ; M1.2 13.295,79.045 12.167,79.045 8.153,75.032 8.153,72.212 C19.2
Net*2_2: 
NetC1_2: C1.2 R1.2 U1.4 U2.1 | length 7.6
  Top Layer w0.508: U1.4 43.536,34.843 43.536,32.69 U2.1
NetC4_2: C4.2 C6.1 D1.1 R3.2 U3.2 | length 11.1
  Top Layer w0.508: D1.1 60.302,40.922 U3.2 60.833,43.434 61.854,44.455 C6.1@62.591,44.455 ; C4.2 C6.1@62.591,44.455 ; R3.2 62.814,47.147 C6.1 C6.1@62.591,44.455
NetC16_2: C16.2 U5.5 Y1.2 | length 15.8
  Top Layer w0.254: C16.2 26.132,55.621 27.305,56.794 ; Y1.2 27.305,56.794 ; U5.5 34.682,54.37 32.639,56.413 27.686,56.413 27.305,56.794
NetC17_2: C17.2 U5.6 Y1.1 | length 18.6
  Top Layer w0.254: C17.2@23.597,49.992 26.827,49.992 27.305,50.47 Y1.1 27.305,55.474 27.661,55.829 32.436,55.829 34.395,53.87 U5.6
NetC18_1: C18.1 U7.20 | length 3.7
  Top Layer w0.254: C18.1 48.006,69.367 49.042,68.331 U7.20
NetC19_1: C19.1 D8.1 M1.1 Q1.3 | length 42
  Top Layer w0.762: M1.1 11.633,77.114 10.744,77.114 6.96,73.33 6.96,70.993 v4@20.422,48.412 ; v4@20.447,48.438 v4@20.422,48.412 ; v4(20.904,48.438) v4@20.422,48.412
  Bottom Layer w0.508: Q1.3@20.904,46.505 v4(20.904,48.438) 23.622,48.438 D8.1@24.232,49.047
NetC20_1: C20.1 D9.1 M2.1 Q2.3 | length 46.7
  Top Layer w0.508: 18.361,37.333 19.687,38.659 v2(27.661,38.659)
  Top Layer w0.762: M2.1 11.989,12.243 8.255,15.977 8.255,17.906 17.835,36.322 18.361,37.333
  Bottom Layer w0.508: Q2.3 27.371,38.369 v2(27.661,38.659) 27.686,38.684 C20.1@27.889,38.684 ; C20.1@27.889,38.659 C20.1@27.889,38.684 ; D9.1@30.81,39.395 30.099,38.684 C20.1@27.889,38.684
NetC21_1: C21.1 U7.10 | length 2.8
  Top Layer w0.254: U7.10 48.542,61.541 49.124,60.96 C21.1
NetC23_1: 
NetC25_1: C25.1 D10.1 M3.1 Q3.3 | length 42.2
  Bottom Layer w0.508: Q3.3 64.684,43.216 C25.1 67.081,43.231 D10.1
  Bottom Layer w0.762: D10.1 82.652,17.932 82.652,16.383 80.442,14.173 M3.1
NetC26_1: C26.1 D11.1 M4.1 Q4.3 | length 60.8
  Bottom Layer w0.508: 51.765,70.51 51.765,68.097 52.578,67.285 55.778,67.285 58.471,66.167 61.239,64.033 61.239,58.344 60.071,57.175 60.071,54.559 60.731,53.899 C26.1@61.239,53.899 ; Q4.3 61.239,51.971 C26.1@61.239,53.899 ; D11.1 63.652,53.899 C26.1 C26.1@61.239,53.899
  Bottom Layer w0.635: 51.765,70.51 52.934,71.679
  Bottom Layer w0.762: 52.934,71.679 71.603,82.067 74.193,82.067 76.632,79.629 76.632,78.435 M4.1
NetC28_1: 
NetC28_2: 
NetD2_1: D2.1 R1.1 | length 4.7
  Top Layer w0.508: R1.1 46.431,32.69 47.473,31.648 48.362,31.648 48.819,31.191 D2.1
NetD2_2: D2.2 U1.1 | length 6.9
  Top Layer w0.508: U1.1 46.507,37.44 46.99,36.957 46.99,33.934 47.422,33.503 D2.2
NetD3_2: D3.2 R9.2 | length 7.5
  Bottom Layer w0.762: R9.2 1.448,80.467 1.6,81.915 D3.2
  other v3: 3.15,84.099
NetD4_2: D4.2 R16.2 | length 7.5
  Bottom Layer w0.762: D4.2 7.036,1.88 11.598,1.88 R16.2
  other v3: 6.142,2.773
NetD5_2: D5.2 R18.2 | length 8.3
  Bottom Layer w0.762: R18.2 88.392,11.471 88.392,7.036 D5.2
  other v3: 87.525,6.169
NetD6_2: D6.2 R19.2 | length 8.2
  Bottom Layer w0.762: R19.2 78.496,88.011 83.109,88.011 D6.2
  other v3: 84.313,86.807
NetD7_2: D7.2 R20.2 | length 2.5
  Bottom Layer w0.508: D7.2 46.355,45.517 46.944,44.928 R20.2
NetQ1_1: Q1.1 R23.2 R25.2 | length 4.4
  Bottom Layer w0.508: Q1.1 21.844,42.159 R25.2 24.186,42.139 R23.2
NetQ2_1: Q2.1 R24.2 R26.2 | length 4.6
  Bottom Layer w0.508: Q2.1 28.321,32.288 28.326,32.283 R24.2@30.861,32.283 ; R26.2@28.849,32.283 R26.2@28.854,32.288
NetQ3_1: Q3.1 R28.2 R30.2 | length 4.3
  Bottom Layer w0.508: Q3.1 65.629,38.959 R30.2 67.747,36.805 R28.2
NetQ4_1: Q4.1 R29.2 R31.2 | length 4.7
  Bottom Layer w0.508: R31.2 62.205,47.503 Q4.1 64.409,49.606 R29.2
NetR5_2: R5.2 U1.3 | length 4
  Top Layer w0.508: R5.2 41.123,37.059 41.504,37.44 U1.3
NRF_CE: U5.22 U8.3 | length 15.1
  Top Layer w0.254: U5.22 42.378,50.216 42.393,50.23 v1(42.393,51.765)
  Bottom Layer w0.254: 42.875,51.537 50.114,51.537 51.105,52.527 51.105,54.28 51.511,54.686 U8.3 U8.3@52.172,54.686
NRF_CSN: U5.25 U8.4 | length 20.2
  Top Layer w0.254: U5.25 46.488,50.87 50.038,47.32 55.753,47.32 56.413,47.981 56.413,52.629 55.093,53.95 U8.4
NRF_INT: U5.19 U8.8 | length 23
  Top Layer w0.254: U5.19 40.878,47.193 41.631,46.441 v1(41.631,45.517)
  Bottom Layer w0.254: v1(41.631,45.517) 41.631,49.327 41.91,49.606 49.276,49.606 49.53,49.606 51.003,48.133 54.635,48.133 55.093,48.59 U8.8
NRF_MISO: U5.27 U8.7 | length 8.3
  Top Layer w0.254: U5.27 47.52,51.87 49.784,49.606 U8.7
NRF_MOSI: U5.28 U8.6 | length 11.2
  Top Layer w0.254: U5.28 50.846,52.37 51.791,53.315 53.569,53.315 54.737,52.146 U8.6 U8.6@55.093,51.689
NRF_SCK: U5.26 U8.5 | length 14.6
  Top Layer w0.254: U5.26 46.953,51.37 50.241,48.082 53.086,48.082 53.797,48.793 53.797,51.689 53.34,52.146 U8.5
RESET: C15.2 R17.1 U5.7 XB6.6 | length 49.4
  Top Layer w0.254: v1(27.127,61.671) 27.127,62.509 28.626,64.008 30.074,65.38 31.013,65.837 35.966,68.174 38.73,70.251 XB6.6 ; v1(27.965,48.692) 27.965,49.733 29.21,50.978 29.21,54.889 29.54,55.22 32.106,55.22 33.955,53.37 U5.7 ; R17.1@30.937,48.082 R17.1
  Top Layer w0.508: C15.2 R17.1@30.937,48.082
  Bottom Layer w0.254: v1(27.127,61.671) 27.127,61.163 25.603,59.639 25.603,52.807 27.965,50.444 v1(27.965,48.692)
RF3V3: C5.2 C8.1 R4.1 U8.2 XB6.1 | length 63.7
  Top Layer w0.381: U8.2@55.093,56.769 U8.2 61.773,57.226 C8.1 C8.1@61.951,58.014
  Top Layer w0.508: C8.1 62.255,55.834 62.789,55.301 R4.1
  Bottom Layer w0.381: XB6.1 30.81,62.027 31.318,61.519 45.796,61.519 46.939,62.662 46.939,65.507 47.625,66.192 55.778,66.192 58.039,65.227 59.919,63.703 59.919,58.217 59.284,57.582 59.284,54.635 58.598,53.95 56.896,53.95 56.439,54.407 56.439,55.397 55.093,56.744 U8.2
RXD: U5.31 XB6.4 | length 37.8
  Top Layer w0.254: U5.31 46.783,53.87 v1(47.701,54.788)
  Bottom Layer w0.254: XB6.4 35.001,67.793 32.309,66.751 28.448,63.754 28.448,60.858 29.439,59.868 40.386,59.868 42.596,57.658 42.752,57.502 45.999,54.254 47.168,54.254 v1(47.701,54.788)
SCL: R22.2 U5.42 U7.23 | length 20.1
  Top Layer w0.254: v1(40.259,67.412) 40.878,66.793 U5.42 ; U7.23 47.542,68.307 47.142,68.707 44.15,68.707 R22.2@43.612,68.169 ; R22.2@43.612,68.169 43.561,68.169 v1(43.586,68.143) R22.2@43.612,68.169
  Bottom Layer w0.254: v1(40.259,67.412) 41.021,66.65 43.129,66.65 43.586,67.107 v1(43.586,68.143)
SDA: R21.2 U5.43 U7.24 | length 20.8
  Top Layer w0.254: v1(39.522,65.761) 40.378,64.905 U5.43 ; R21.2@43.561,64.364 43.561,64.13 43.536,64.105 43.561,64.105 44.394,64.105 44.78,64.491 44.78,67.716 45.161,68.097 46.761,68.097 47.042,67.816 U7.24
  Bottom Layer w0.254: v1(39.522,65.761) 40.538,64.745 v1(43.51,64.745) 43.51,64.592 43.536,64.567 v1@43.51,64.567
SDIO_CLK: U4.5 U5.32 | length 25.4
  Top Layer w0.254: U5.32 43.854,54.37 43.586,54.102 43.586,50.749 45.644,48.692 v1(45.644,48.489)
  Bottom Layer w0.305: v1(45.644,48.489) 44.602,47.447 44.602,45.237 45.644,44.196 45.644,37.719 46.279,37.084 48.844,37.084 49.429,37.669 U4.5
SDIO_CMD: R12.2 U4.3 U5.33 | length 28.1
  Top Layer w0.254: v1(41.961,54.889) 41.98,54.87 U5.33
  Bottom Layer w0.254: 38.913,48.641 38.913,52.68 39.446,53.213 39.446,54.458 39.878,54.889 v1(41.961,54.889)
  Bottom Layer w0.305: R12.2 38.481,47.676 38.913,48.108 ; 38.913,48.641 38.913,48.108 ; U4.3 44.429,40.568 44.78,40.919 44.78,43.84 44.221,44.399 40.97,44.399 40.411,44.958 40.411,46.609 38.913,48.108
  Bottom Layer w0.381: U4.3 U4.3@44.429,38.996
SDIO_D0: R13.2 U4.7 U5.14 | length 39.8
  Top Layer w0.254: v1(36.652,34.519) 36.043,34.519 35.56,35.001 35.56,44.272 38.378,47.09 U5.14 38.378,50.39 v1(37.841,50.927)
  Bottom Layer w0.254: v1(36.652,34.519) 42.342,34.519 42.875,35.052 43.038,35.215 43.332,35.509 49.403,35.509 50.902,37.008 53.823,37.008 54.354,37.539 U4.7 ; R13.2 v1(37.841,50.927)
SDIO_D1: R14.2 U4.8 U5.15 | length 60
  Top Layer w0.254: v1(38.329,53.899) 38.405,53.823 38.405,52.375 ; 38.405,52.781 38.405,52.375 ; U5.15 38.878,51.537 38.405,52.01 38.405,52.375
  Bottom Layer w0.254: R14.2 38.024,52.603 38.329,52.908 v1(38.329,53.899) 34.62,53.899 33.503,53.899 30.429,50.825 30.429,50.267 30.429,48.743 34.061,45.11 34.061,41.377 34.595,40.843 37.77,40.843 38.151,40.462 38.151,36.678 38.583,36.246 49.2,36.246 50.571,37.617 52.807,37.617 53.086,37.897 53.086,38.506 ; 53.086,38.125 53.086,38.506 ; U4.8 56.058,40.691 55.702,41.046 53.67,41.046 53.086,40.462 53.086,38.506
SDIO_D2: R10.2 U4.1 U5.16 | length 13.2
  Top Layer w0.254: v1(37.084,42.139) 37.084,44.704 39.378,46.998 U5.16
  Bottom Layer w0.508: v1(37.084,42.139) 37.643,42.139 37.668,42.164 38.456,42.164 39.446,41.173 ; 39.205,41.415 39.446,41.173 ; U4.1 39.446,41.173
SDIO_D3: R11.2 U4.2 U5.17 | length 13.5
  Top Layer w0.254: v1(38.354,44.348) 38.354,44.958 39.878,46.482 U5.17
  Bottom Layer w0.381: R11.2 37.739,44.298 v1@38.354,44.298 ; v1(38.354,44.348) v1@38.354,44.298 ; U4.2 41.935,40.081 38.354,43.663 v1@38.354,44.298
SINT: R27.2 U5.20 U7.12 | length 35.4
  Top Layer w0.254: v1(39.903,51.892) 39.903,51.64 41.378,50.165 41.378,49.962 U5.20 41.378,47.776 42.901,46.253 42.901,44.75 41.605,43.454 R27.2 ; U7.12 50.407,62.801 50.673,62.535 v1(51.384,62.535)
  Bottom Layer w0.254: v1@40.005,51.892 40.005,53.416 40.462,53.873 45.339,53.873 46.99,52.222 49.555,52.222 50.292,52.959 50.292,60.096 51.384,61.189 v1(51.384,62.535)
SWCLK: U5.37 U6.4 | length 21.9
  Top Layer w0.254: U5.37 43.378,59.583 43.891,60.096 v1(44.399,60.096)
  Bottom Layer w0.254: v1(44.399,60.096) 47.219,60.096 47.828,60.706 47.828,65.202 48.158,65.532 55.067,65.532 57.074,63.525 U6.4
SWDIO: U5.34 U6.3 | length 25.8
  Top Layer w0.254: v1(45.085,58.09) 43.383,56.388 43.383,55.753 43.766,55.37 U5.34
  Bottom Layer w0.254: v1(45.085,58.09) 46.228,59.233 47.701,59.233 48.641,60.173 48.641,64.237 49.2,64.795 54.534,64.795 55.804,63.525 55.804,61.747 56.566,60.985 U6.3
TXD: U5.30 XB6.3 | length 37.3
  Top Layer w0.254: U5.30 v1(48.357,53.37)
  Bottom Layer w0.254: XB6.3 32.334,65.88 29.667,63.938 29.235,63.505 29.235,61.265 30.048,60.452 40.818,60.452 45.263,56.007 48.743,56.007 49.454,55.296 49.454,53.975 48.849,53.37 v1(48.357,53.37)
VBAT: C3.2 C7.1 D1.2 R2.1 R7.2 U3.3 | length 31.9
  Top Layer w0.381: 53.391,44.877 53.391,40.919 53.95,40.361 D1.2
  Top Layer w0.508: C7.1 52.04,45.309 52.959,45.309 53.391,44.877 53.823,45.309 C3.2 56.027,45.309 58.403,47.684 58.802,47.684 U3.3@58.802,43.434 ; D1.2 55.241,36.326 55.753,35.814 58.166,35.814 58.674,35.306 R2.1 R7.2
VBATIN: BAT.1 C2.2 S1.1 U1.5 | length 16.9
  Top Layer w0.508: U1.5@45.263,34.696 45.31,34.696 45.553,34.94 U1.5 ; C2.2 49.779,35.514 51.892,33.401 BAT.1
  Bottom Layer w0.508: v2@45.263,34.696 45.31,34.696 v2@45.312,34.698 ; v2(45.466,34.544) 49.505,34.544 50.648,33.401 BAT.1 ; BAT.1@52.375,33.706 BAT.1 ; S1.1 52.857,30.836 52.375,31.318 BAT.1
VGND: BAT.2 C1.1 C2.1 R5.1 R6.1 U1.2 U2.5 | length 39.5
  Top Layer w0.508: R5.1 v1(41.123,33.35) 40.462,33.35 39.7,34.112 39.7,38.379 40.386,39.065 43.917,39.065 44.389,38.593 ; U1.2 44.389,38.593 ; C1.1 v1(45.72,30.429) 46.38,30.429 46.736,30.074 U2.5 ; BAT.2 51.613,35.941 51.308,36.246 51.003,36.551 50.14,37.414 C2.1 48.844,38.659 48.412,39.091 44.887,39.091 44.389,38.593 ; v2(56.82,37.16) R6.1
  Bottom Layer w0.508: v1(41.123,33.35) 41.123,30.988 41.681,30.429 v1(45.72,30.429) ; BAT.2 55.042,35.941 55.347,36.246 55.651,36.551 56.261,37.16 v2(56.82,37.16)
pads on no net: S1.3 S1.4 S1.5 S1.6 U2.2 U2.3 U2.4 U2.6 U2.7 U2.8 U2.9 U2.MH1 U2.MH2 U4.9 U4.10 U4.11 U4.12 U5.2 U5.3 U5.4 U5.29 U5.38 U5.39 U5.40 U7.0 U7.2 U7.3 U7.4 U7.5 U7.6 U7.7 U7.14 U7.15 U7.16 U7.17 U7.19 U7.21 U7.22

## Keep-outs
Keep-Out Layer:
  circle w0.127: c8.625,8.57 r3.7
  circle w0.127: c81.625,8.57 r3.5
  circle w0.127: c81.625,81.57 r3.5
  circle w0.127: c8.625,81.57 r3.5
  lines w0.127: 1.189,12.689 ccw(c8.625,8.57) 12.743,1.135 42.702,17.728 cw(c45.125,13.355) 47.548,17.728 77.506,1.135 ccw(c81.625,8.57) 89.061,12.689 72.467,42.648 cw(c76.841,45.07) 72.467,47.493 89.061,77.452 ccw(c81.625,81.57) 77.507,89.006 47.548,72.412 cw(c45.125,76.786) 42.702,72.412 12.743,89.006 ccw(c8.625,81.57) 1.189,77.452 17.783,47.493 cw(c13.409,45.07) 17.783,42.648 1.189,12.689 ; 9.316,17.042 cw(c8.625,8.57) 17.097,9.262 37.098,20.34 cw(c45.125,45.07) 20.395,37.044 9.316,17.042 ; 9.316,73.099 ccw(c8.625,81.57) 17.097,80.879 37.098,69.8 ccw(c45.125,45.07) 20.395,53.097 9.316,73.099 ; 53.152,20.34 ccw(c45.125,45.07) 69.855,37.044 80.934,17.042 ccw(c81.625,8.57) 73.153,9.262 53.151,20.34 ; 53.152,69.8 cw(c45.125,45.07) 69.855,53.097 80.934,73.099 cw(c81.625,81.57) 73.153,80.879 53.151,69.8